# Altium PCB CaneraCageBB Fixed.PcbDoc
Units mil, origin at the board's own origin, x right, y up, seen from the top; angles counter-clockwise.
Board outline 6000 x 2000 mil, 2 copper layers (Top Layer, Bottom Layer); 14 components, 0 nets, 154 pads, 0 vias.
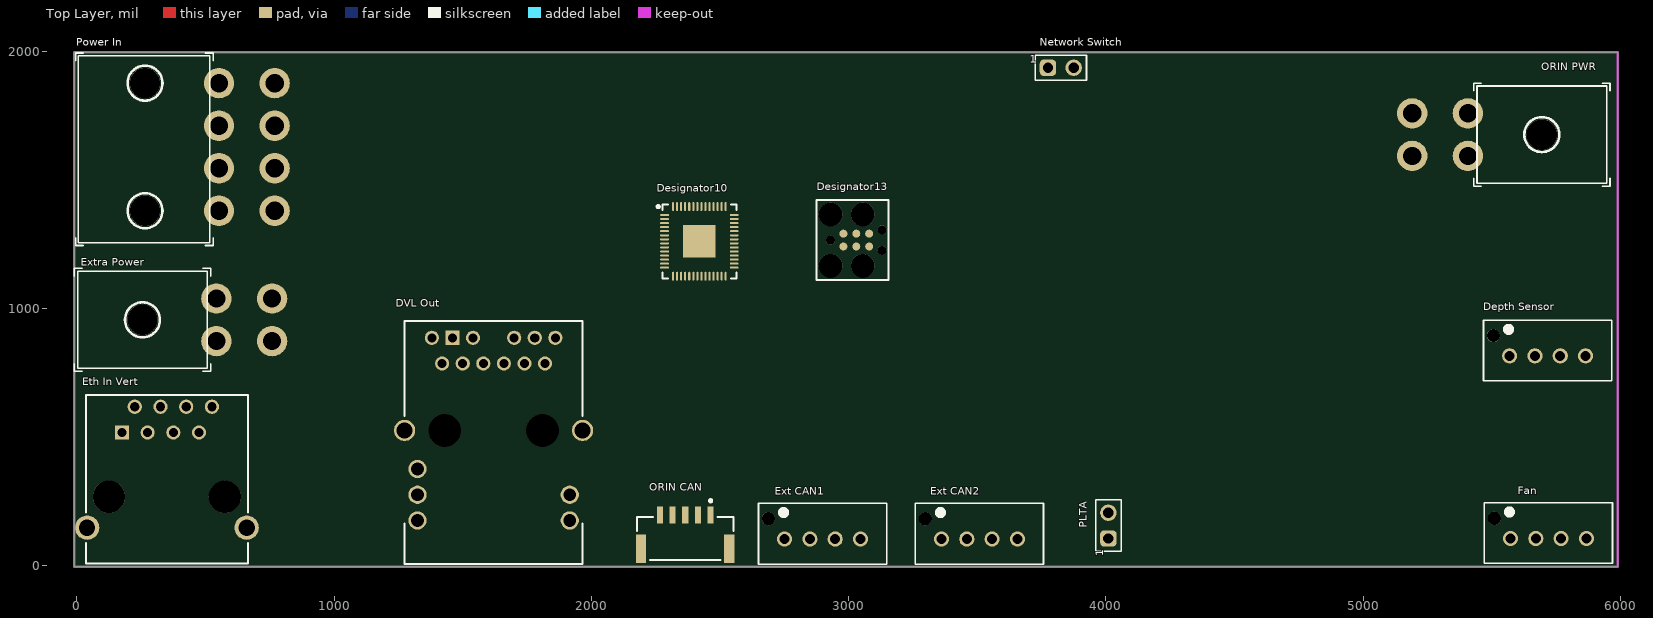
[diagram p0: Top Layer view]
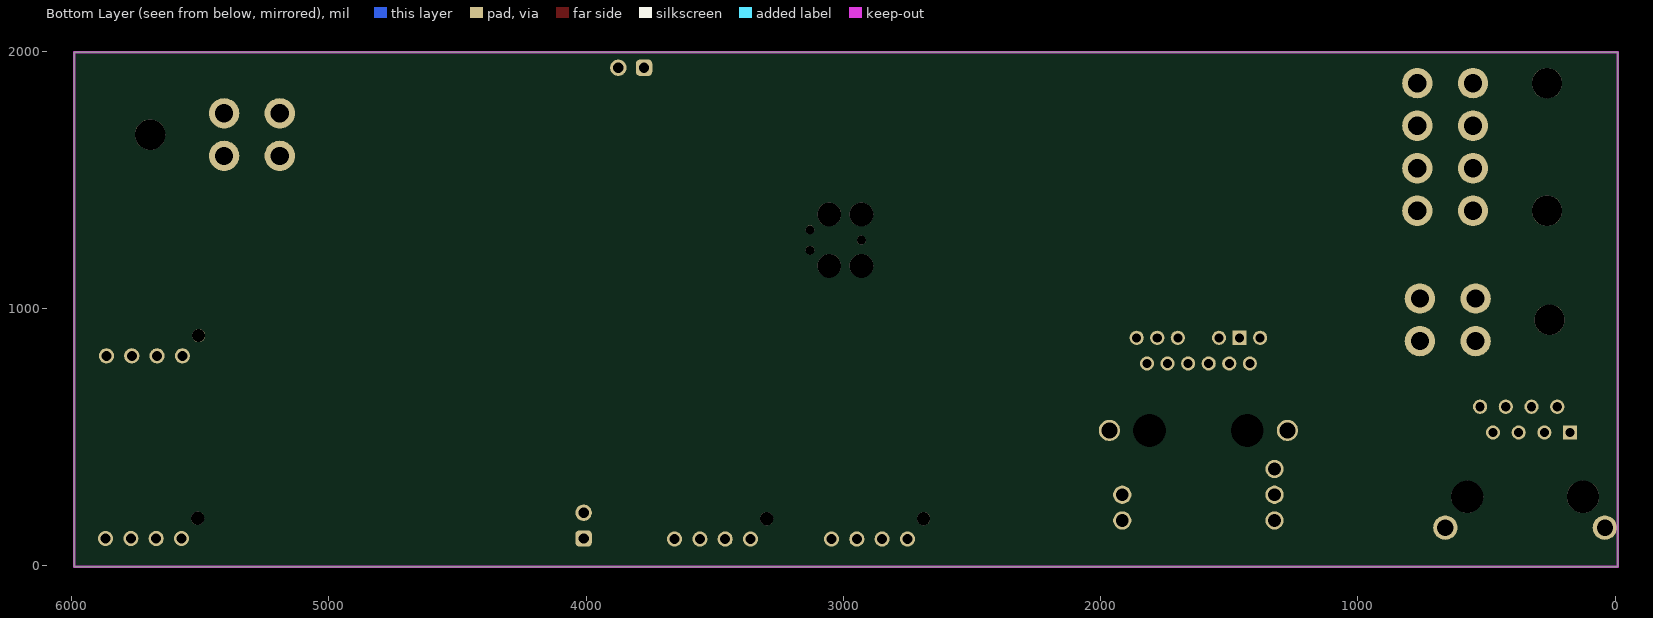
[diagram p1: Bottom Layer view, seen from below]

## Layer stack, top to bottom
Top Solder: solder mask 0.4, Solder Resist, Dk 3.5
Top Layer: signal copper 1.4
Dielectric 1: dielectric 12.6, FR-4, Dk 4.8
Bottom Layer: signal copper 1.4
Bottom Solder: solder mask 0.4, Solder Resist, Dk 3.5

## Board outline
-10,-5 5990,-5 5990,1995 -10,1995

## Design rules (kind name [scope] priority, off if disabled: settings)
Clearance [All] p1: gap=10 ignorepadtopadclearanceinfootprint=FALSE except(0: Arc-Hole Track-Hole SMDPad-Hole THPad-Hole Via-Hole Fill-Hole Poly-Hole Region-Hole Text-Hole)
PolygonConnect [All] p1: connectstyle=Relief reliefconductorwidth=10 reliefentries=4 polygonreliefangle="90 Angle" airgapwidth=10
RoutingVias [All] p1: holewidth=28 width=50 viastyle="Through Hole" minholewidth=28 minwidth=50 maxholewidth=28 maxwidth=50
SolderMaskExpansion [All] p1: expansion=4 istentingtop=FALSE
Width [All] p1: maxlimit=10 minlimit=10 preferedwidth=10
30 further rules are at their usual default settings.

## Components (designator, comment, footprint, x,y, rotation, side; value= is the part's Value field where it differs from the comment)
"Depth Sensor" "Comment" CONN_B4B-XH-AM_JST 5569.72,815 r0 top
Designator10 "Comment" "QFN-56 RP2040" 2420,1260 r0 top
Designator13 "Comment" TC2030-MCP 2930,1265 r0 top
"DVL Out" "Comment" BELS-L829-1J1T-43_V 1620,525 r180 top
"Eth In Vert" "Comment" 615008138221 350,335 r0 top
"Ext CAN1" "Comment" CONN_B4B-XH-AM_JST 2751.18,102.75 r0 top
"Ext CAN2" "Comment" CONN_B4B-XH-AM_JST 3361.18,102.75 r0 top
"Extra Power" "Comment" "CONN_MOLEX_MINIFIT JR_4 POS_R/A" 255,955 r270 top
Fan "Comment" CONN_B4B-XH-AM_JST 5573.15,105 r0 top
"Network Switch" "Comment" HEADER_2PIN_2.54MM 3775,1935 r0 top
"ORIN CAN" "Comment" FP-BM05B-GVHS-TB_LF_SN-MFG 2365,105 r0 top
"ORIN PWR" "Comment" "CONN_MOLEX_MINIFIT JR_4 POS_R/A" 5695,1675 r90 top
PLTA "Comment" HEADER_2PIN_2.54MM 4010,105 r90 top
"Power In" "Comment" "CONN_MOLEX_MINIFIT JR_8 POS_R/A" 265,1875 r270 top

## Footprints (in the part's own frame and the unit in brackets; to place one, negate y for a bottom-side part, rotate by r counter-clockwise, add the part's x,y. Pads: shape width x height; smd on the part's side, far side on the other; paste and mask are expansions set on the pad)
615008138221 [mm] "Modular Jack Vertical Shielded 8P8C Front Post"
  rect 1.4x1.4 hole 0.9: 1(-4.445,4.625)
  round 1.4 hole 0.9: 2(-3.175,7.165) 3(-1.905,4.625) 4(-0.635,7.165) 5(0.635,4.625) 6(1.905,7.165) 7(3.175,4.625) 8(4.445,7.165)
  round 3.17 hole 3.17 unplated: MH1(-5.715,-1.725) MH2(5.715,-1.725)
  round 2.4 hole 1.6: S1(-7.875,-4.775) S2(7.875,-4.775)
  silkscreen extent -8,-8.32 8,8.32, body extent -8,-8.32 8,8.33, height 16.62
BELS-L829-1J1T-43_V [mm] "THD, 19-Leads, Body 23.94x17.58mm, Pitch 2.03mm"
  rect 1.4x1.4 hole 0.89: 1(4.064,-9.144)
  round 1.4 hole 0.89: 2(6.096,-9.144) 3(2.032,-9.144) 4(1.016,-6.604) 5(5.08,-6.604) 6(3.048,-6.604) 7(-1.016,-6.604) 8(-5.08,-6.604) 9(-3.048,-6.604) 10(-4.064,-9.144) 11(-6.096,-9.144) 12(-2.032,-9.144)
  round 1.8 hole 1.27: 13(-7.518,6.35) 14(-7.518,8.89) 15(7.518,3.81) 16(7.518,6.35) 17(7.518,8.89)
  round 2.95 hole 3.25 unplated: MH1(-4.826,0) MH2(4.826,0)
  round 2.1 hole 1.57: S1(-8.788,0) S2(8.788,0)
  silkscreen extent -8.79,-10.8 8.79,13.2, body extent -10.35,-10.8 10.35,13.2, height 12.74
CONN_B4B-XH-AM_JST [mil]
  round 59 hole 39 mask+4: 1(0,0) 2(98.43,0) 3(196.85,0) 4(295.28,0)
  round 51 hole 51 unplated: 5(-62.99,78.74)
  silkscreen extent -101,-97 397,139, body extent 0,0 10,10, height 10
"CONN_MOLEX_MINIFIT JR_4 POS_R/A" [mm] "Molex Minifit Jr 5569 4 Pos R/A"
  round 3 hole 1.8: 1(2.1,7.3) 2(-2.1,7.3) 3(2.1,12.8) 4(-2.1,12.8)
  round 3 hole 3 unplated mask+0: ""(0,0)
  silkscreen extent -5.08,-6.73 5.08,6.73, body extent -5,-6.48 5,13.46, height 11.4
"CONN_MOLEX_MINIFIT JR_8 POS_R/A" [mm] "Molex Minifit Jr 5569 8 Pos R/A"
  round 3 hole 1.801: 1(12.6,7.3) 2(8.4,7.3) 5(12.6,12.8) 6(8.4,12.8)
  round 3 hole 1.8: 3(4.2,7.3) 4(0,7.3) 7(4.2,12.8) 8(0,12.8)
  round 3 hole 3 unplated mask+0: ""(0,0) ""(12.6,0)
  silkscreen extent -2.98,-6.86 16.03,6.73, body extent -2.7,-6.6 15.7,13.34, height 11.01
FP-BM05B-GVHS-TB_LF_SN-MFG [mm]
  rect 0.6x1.7 smd paste+0 mask+0: 1(2.5,2.325) 2(1.25,2.325) 3(0,2.325) 4(-1.25,2.325) 5(-2.5,2.325)
  rect 1x2.8 smd paste+0 mask+0: 6(-4.35,-1.025) 7(4.35,-1.025)
  silkscreen extent -4.75,-2.12 4.75,3.85, body extent -4.95,-2.52 4.95,3.27, height 0.25
HEADER_2PIN_2.54MM [mm]
  rrect50% 1.62x1.62 hole 1.02: 1(0,0)
  round 1.62 hole 1.02: 2(2.54,0)
  silkscreen extent -1.27,-1.25 3.81,1.25, body extent -1.27,-1.25 3.81,1.29, height 8.39
"QFN-56 RP2040" [mm] "QFN, 56-Leads, Body 7.00x7.00mm, Pitch 0.40mm, Thermal Pad 3.10x3.10mm, IPC Medium Density"
  oval 0.875x0.2 smd: 1(-3.437,2.6) 2(-3.437,2.2) 3(-3.437,1.8) 4(-3.437,1.4) 5(-3.437,1) 6(-3.437,0.6) 7(-3.437,0.2) 8(-3.437,-0.2) 9(-3.437,-0.6) 10(-3.437,-1) 11(-3.437,-1.4) 12(-3.437,-1.8) 13(-3.437,-2.2) 14(-3.437,-2.6) 29(3.437,-2.6) 30(3.437,-2.2) 31(3.437,-1.8) 32(3.437,-1.4) 33(3.437,-1) 34(3.437,-0.6) 35(3.437,-0.2) 36(3.437,0.2) 37(3.437,0.6) 38(3.437,1) 39(3.437,1.4) 40(3.437,1.8) 41(3.437,2.2) 42(3.437,2.6)
  oval 0.2x0.875 smd: 15(-2.6,-3.437) 16(-2.2,-3.437) 17(-1.8,-3.437) 18(-1.4,-3.437) 19(-1,-3.437) 20(-0.6,-3.437) 21(-0.2,-3.437) 22(0.2,-3.437) 23(0.6,-3.437) 24(1,-3.437) 25(1.4,-3.437) 26(1.8,-3.437) 27(2.2,-3.437) 28(2.6,-3.437) 43(2.6,3.437) 44(2.2,3.437) 45(1.8,3.437) 46(1.4,3.437) 47(1,3.437) 48(0.6,3.437) 49(0.2,3.437) 50(-0.2,3.437) 51(-0.6,3.437) 52(-1,3.437) 53(-1.4,3.437) 54(-1.8,3.437) 55(-2.2,3.437) 56(-2.6,3.437)
  rect 3.2x3.2 smd: 57(0,0)
  silkscreen extent -4.19,-3.65 3.65,3.65, body extent -3.52,-3.52 3.52,3.52, height 0.85
TC2030-MCP [mil]
  round 31 smd: 1(50,-25) 2(50,25) 3(100,-25) 4(100,25) 5(150,-25) 6(150,25)
  round 34 hole 35 unplated: A(0,0) B(200,40) C(200,-40)
  round 92 hole 93 unplated: D(0,-100) E(125,-100) F(0,100) G(125,100)
  silkscreen extent -55,-155 225,155

## Nets (pads, with @x,y where several pads share a name; then routed paths per layer and width w, separated by ;. In a path a pad name is that pad's centre, name@x,y a point inside that pad or via, vN(x,y) a via of type N, cw(c..) or ccw(c..) an arc to the next point about the centre after c; other vN are vias at no path point)
pads on no net: "Depth Sensor.1" "Depth Sensor.2" "Depth Sensor.3" "Depth Sensor.4" "Depth Sensor.5" "DVL Out.1" "DVL Out.2" "DVL Out.3" "DVL Out.4" "DVL Out.5" "DVL Out.6" "DVL Out.7" "DVL Out.8" "DVL Out.9" "DVL Out.10" "DVL Out.11" "DVL Out.12" "DVL Out.13" "DVL Out.14" "DVL Out.15" "DVL Out.16" "DVL Out.17" "DVL Out.MH1" "DVL Out.MH2" "DVL Out.S1" "DVL Out.S2" "Eth In Vert.1" "Eth In Vert.2" "Eth In Vert.3" "Eth In Vert.4" "Eth In Vert.5" "Eth In Vert.6" "Eth In Vert.7" "Eth In Vert.8" "Eth In Vert.MH1" "Eth In Vert.MH2" "Eth In Vert.S1" "Eth In Vert.S2" "Ext CAN1.1" "Ext CAN1.2" "Ext CAN1.3" "Ext CAN1.4" "Ext CAN1.5" "Ext CAN2.1" "Ext CAN2.2" "Ext CAN2.3" "Ext CAN2.4" "Ext CAN2.5" "Extra Power.1" "Extra Power.2" "Extra Power.3" "Extra Power.4" "Extra Power." "Network Switch.1" "Network Switch.2" "ORIN CAN.1" "ORIN CAN.2" "ORIN CAN.3" "ORIN CAN.4" "ORIN CAN.5" "ORIN CAN.6" "ORIN CAN.7" "ORIN PWR.1" "ORIN PWR.2" "ORIN PWR.3" "ORIN PWR.4" "ORIN PWR." "Power In.1" "Power In.2" "Power In.3" "Power In.4" "Power In.5" "Power In.6" "Power In.7" "Power In.8" "Power In." Designator10.1 Designator10.2 Designator10.3 Designator10.4 Designator10.5 Designator10.6 Designator10.7 Designator10.8 Designator10.9 Designator10.10 Designator10.11 Designator10.12 Designator10.13 Designator10.14 Designator10.15 Designator10.16 Designator10.17 Designator10.18 Designator10.19 Designator10.20 Designator10.21 Designator10.22 Designator10.23 Designator10.24 Designator10.25 Designator10.26 Designator10.27 Designator10.28 Designator10.29 Designator10.30 Designator10.31 Designator10.32 Designator10.33 Designator10.34 Designator10.35 Designator10.36 Designator10.37 Designator10.38 Designator10.39 Designator10.40 Designator10.41 Designator10.42 Designator10.43 Designator10.44 Designator10.45 Designator10.46 Designator10.47 Designator10.48 Designator10.49 Designator10.50 Designator10.51 Designator10.52 Designator10.53 Designator10.54 Designator10.55 Designator10.56 Designator10.57 Designator13.1 Designator13.2 Designator13.3 Designator13.4 Designator13.5 Designator13.6 Designator13.A Designator13.B Designator13.C Designator13.D Designator13.E Designator13.F Designator13.G Fan.1 Fan.2 Fan.3 Fan.4 Fan.5 PLTA.1 PLTA.2

## Keep-outs
Keep-Out Layer:
  the board outline again, w10

## Text inside footprints (layer, text, board x,y; h text height)
"Network Switch": Top Overlay "1" at 3705,1955 h30
PLTA: Top Overlay "1" at 3990,35 h30 r90